# EAGLE board BreadboardPowerSupplyStick1.8V-v10 (EAGLE 6.5.0)

Size 100 x 80 mm. Coordinates in mm from the lower left corner, seen from the top.
Outline: 0,0 100,0 100,80 0,80 0,0
Copper layers (1*16): Top 0.035mm / dielectric 1.5mm / Bottom 0.035mm
Design rules "default": minimum track width 10mil, minimum drill 24mil, track to track 8mil, track to pad 8mil, pad to pad 8mil, via to via 8mil, smd to smd 8mil, copper to edge 40mil, drill to drill 8mil, minimum pad ring 10mil, minimum via ring 8mil, stop-mask expansion 4mil, vias tented up to drill 0mil, thermal gap 10mil
Net classes: 0 default: width 0.203 mm; 1 power: width 0.508 mm

## Footprints (pad centres in the part's own frame; a part is rotated, then mirrored left to right if it is on the bottom)
EIA7343 = smd 2.55 x 2.7: A 3.17,0; C -3.17,0
EIA3216 = smd 1.4 x 1.6: A 1.4,0; C -1.4,0
0603-CAP = smd 1.1 x 1: 1 -0.85,0; 2 0.85,0
SMA-DIODE = smd 1.27 x 1.47: A -2.15,0; C 2.15,0
PTC-1206 = smd 1 x 1.8: 1 -1.4,0; 2 1.4,0
POWER_JACK_SMD = smd 2.8 x 2.4: GND 0,-5.7; P$4 6.1,-5.7; VIN0 0,5.7; VIN1 6.1,5.7 | hole 2.032: 0,0; 4.572,0
1X01 = drill 1.016 pad 1.88: 1 0,0
1X02 = drill 1.016 pad 1.88: 1 0,0; 2 2.54,0
MICRO-FIDUCIAL = smd 0.635 x 0.635: 1 0,0
LED-0603 = smd 0.8 x 0.8: A 0,-0.75; C 0,0.75
0603-RES = smd 1.1 x 1: 1 -0.85,0; 2 0.85,0
AYZ0202 = smd 1 x 1.15: 1 -2.5,2.825; 2 0,2.825; 3 2.5,2.825; 4 -2.5,-2.825; 5 0,-2.825; 6 2.5,-2.825 | hole 0.85: 1.5,0; -1.5,0
SOT223 = smd 1.219 x 2.235: 1 -2.311,-3.099; 2 0,-3.099; 3 2.311,-3.099 | smd 3.6 x 2.2: 4 0,3.099

## Placement (x,y rotation side)
C1  100uF  [EIA7343]  -19.05,40.64 0 top  (outside the outline)
C2  10uF  [EIA3216]  -22.86,45.72 0 top  (outside the outline)
C3  0.1uF  [0603-CAP]  -27.94,45.72 0 top  (outside the outline)
D1  1N4001  [SMA-DIODE]  -16.51,45.72 0 top  (outside the outline)
F1  PTCSMD  [PTC-1206]  -34.29,40.64 0 top  (outside the outline)
J1  POWER_JACKSMD  [POWER_JACK_SMD]  -22.86,7.62 0 top  (outside the outline)
JP1  M01PTH  [1X01]  -41.91,3.81 0 top  (outside the outline)
JP2  M01PTH  [1X01]  -19.05,19.05 0 top  (outside the outline)
JP3  M01PTH  [1X01]  -27.94,19.05 0 top  (outside the outline)
JP4  M01PTH  [1X01]  -36.83,19.05 0 top  (outside the outline)
JP5  [1X02]  -29.21,39.37 0 top  (outside the outline)
JP6  FIDUCIALUFIDUCIAL  [MICRO-FIDUCIAL]  -19.05,49.53 0 top  (outside the outline)
JP7  FIDUCIALUFIDUCIAL  [MICRO-FIDUCIAL]  -21.59,49.53 0 top  (outside the outline)
LED2  Power  [LED-0603]  -35.56,31.75 0 top  (outside the outline)
R1  240  [0603-RES]  -31.75,45.72 0 top  (outside the outline)
R2  105  [0603-RES]  -35.56,45.72 0 top  (outside the outline)
R3  287  [0603-RES]  -39.37,45.72 0 top  (outside the outline)
R4  240  [0603-RES]  -43.18,45.72 0 top  (outside the outline)
S1  On/Off  [AYZ0202]  -16.51,26.67 0 top  (outside the outline)
S2  Voltage  [AYZ0202]  -24.13,26.67 0 top  (outside the outline)
U1  V_REG_317SMD  [SOT223]  -31.75,5.08 0 top  (outside the outline)
U$1  LOGO-SFESK  [SFE-LOGO-FLAME]  -39.37,39.37 0 top  (outside the outline)
U$2  LOGO-SFENEW  [SFE-NEW-WEBLOGO]  -31.75,31.75 0 top  (outside the outline)
U$6  OSHW-LOGOS  [OSHW-LOGO-S]  -15.24,49.53 0 top  (outside the outline)

## Library data of the parts
C1-C3 D1 F1 J1 JP1-JP7 R1-R4 S1 S2 U1 U$1 U$2 U$6 = SparkFun
LED2 = SparkFun-Nate

## Nets
GND: C1.C C2.C C3.2 J1.GND J1.P$4 JP1.1 JP4.1 JP5.2 LED2.C R3.1 S2.3
N$1: D1.C F1.1
N$2: D1.A S1.1 S1.4
N$4: R2.1 R3.2 S2.2
N$5: R1.1 R2.2 U1.1
N$8: LED2.A R4.1
RAW: C1.A F1.2 U1.3
VCC: C2.A C3.1 JP2.1 JP3.1 R1.2 R4.2 U1.2
VIN: J1.VIN0 JP5.1 S1.2 S1.5

## Tracks (layer width: path | path; a pad name or v marks a point on that pad's centre or on a via)
GND  (10 unrouted)
N$1  (1 unrouted)
N$2  (2 unrouted)
N$4  (2 unrouted)
N$5  (2 unrouted)
N$8  (1 unrouted)
RAW  (2 unrouted)
VCC  (6 unrouted)
VIN  (3 unrouted)